# Altium PCB A7000RiscPC_Joystick.PcbDoc
Units mm, origin at the board's own origin, x right, y up, seen from the top; angles counter-clockwise.
Board outline 75 x 84 mm, 2 copper layers (Top Layer, Bottom Layer), stack 1.671 mm thick; 45 components, 73 nets, 211 pads, 66 vias.
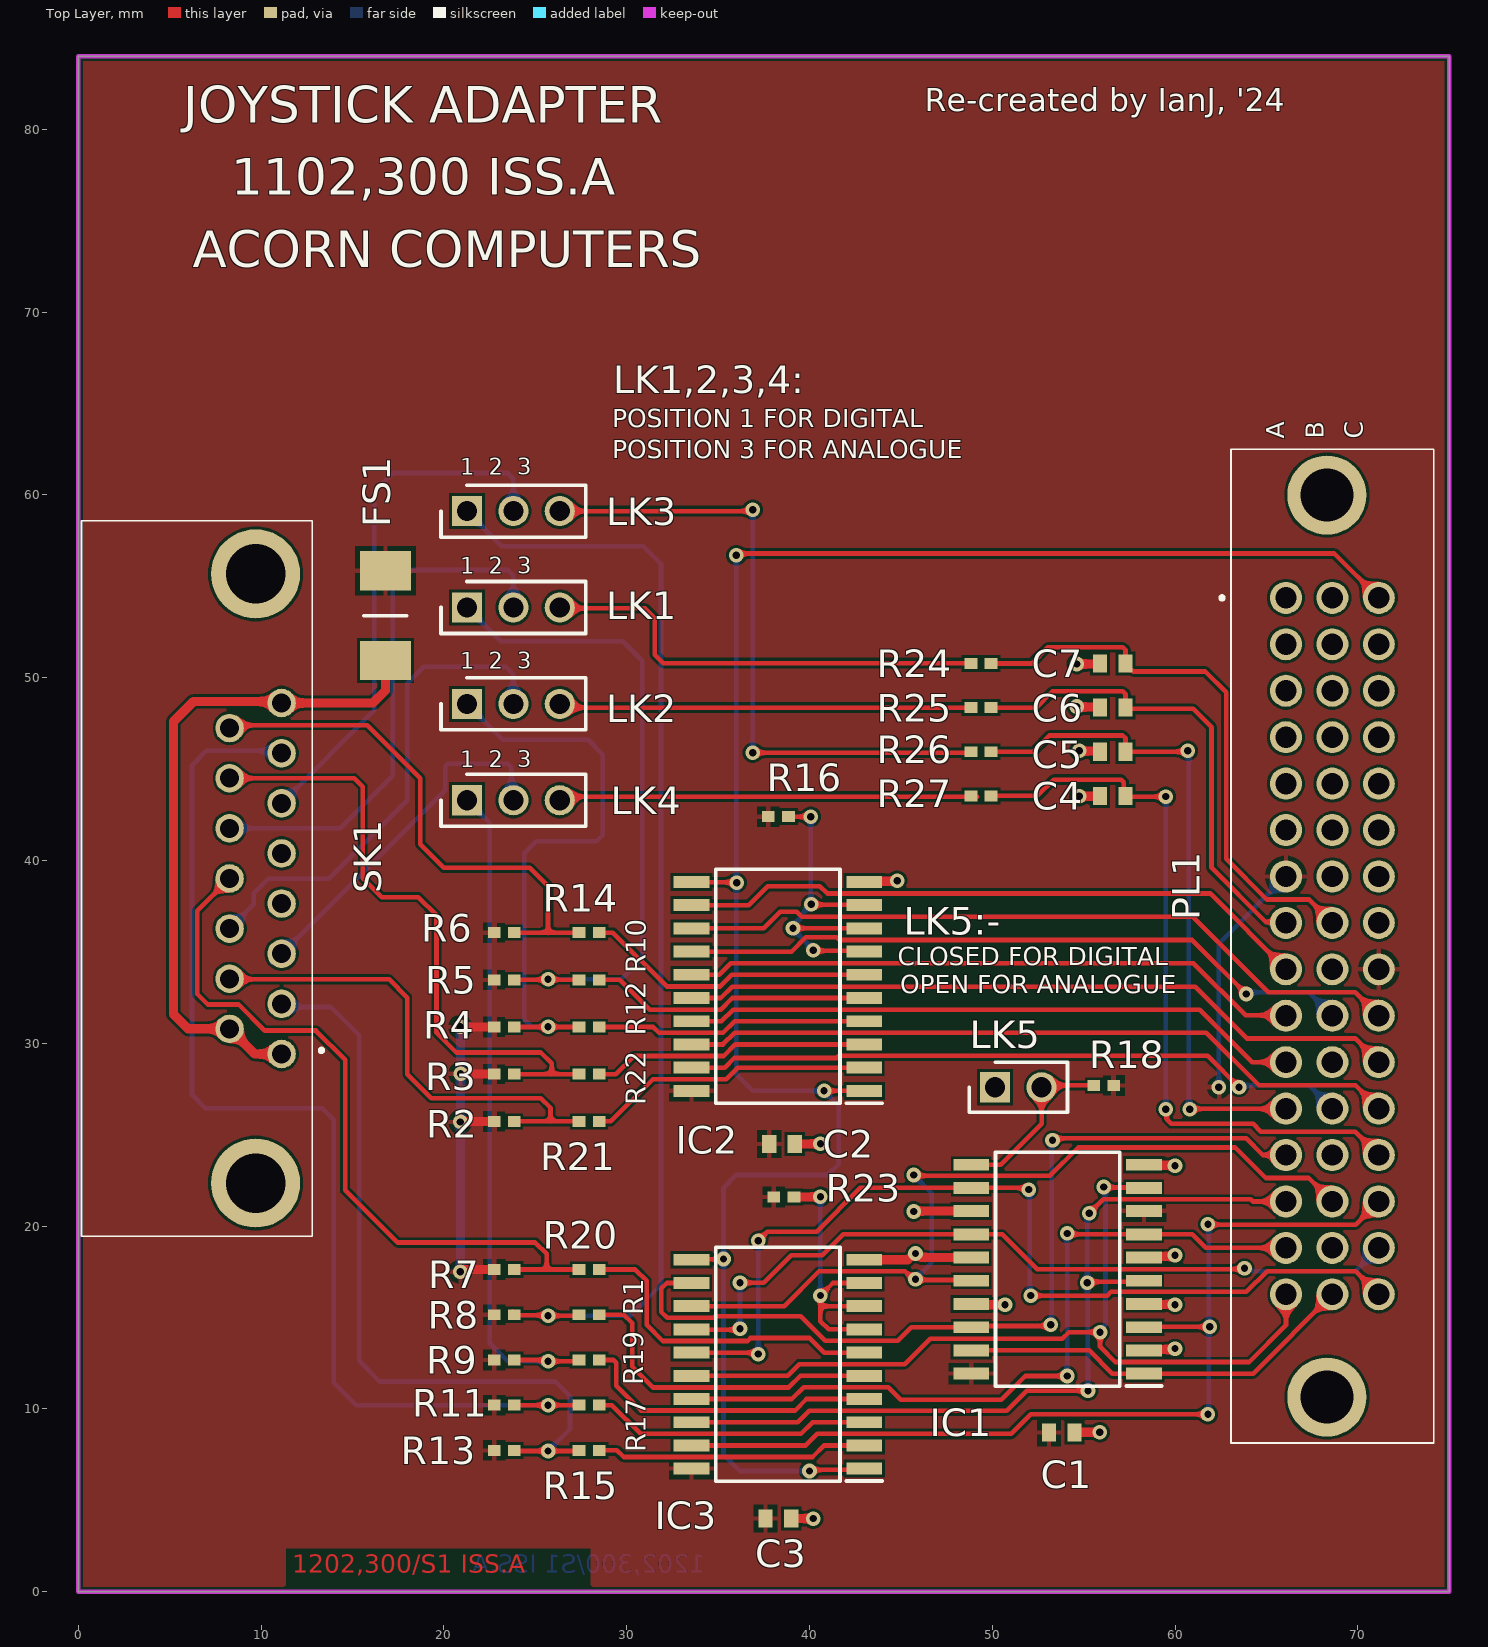
[diagram p0: Top Layer view]
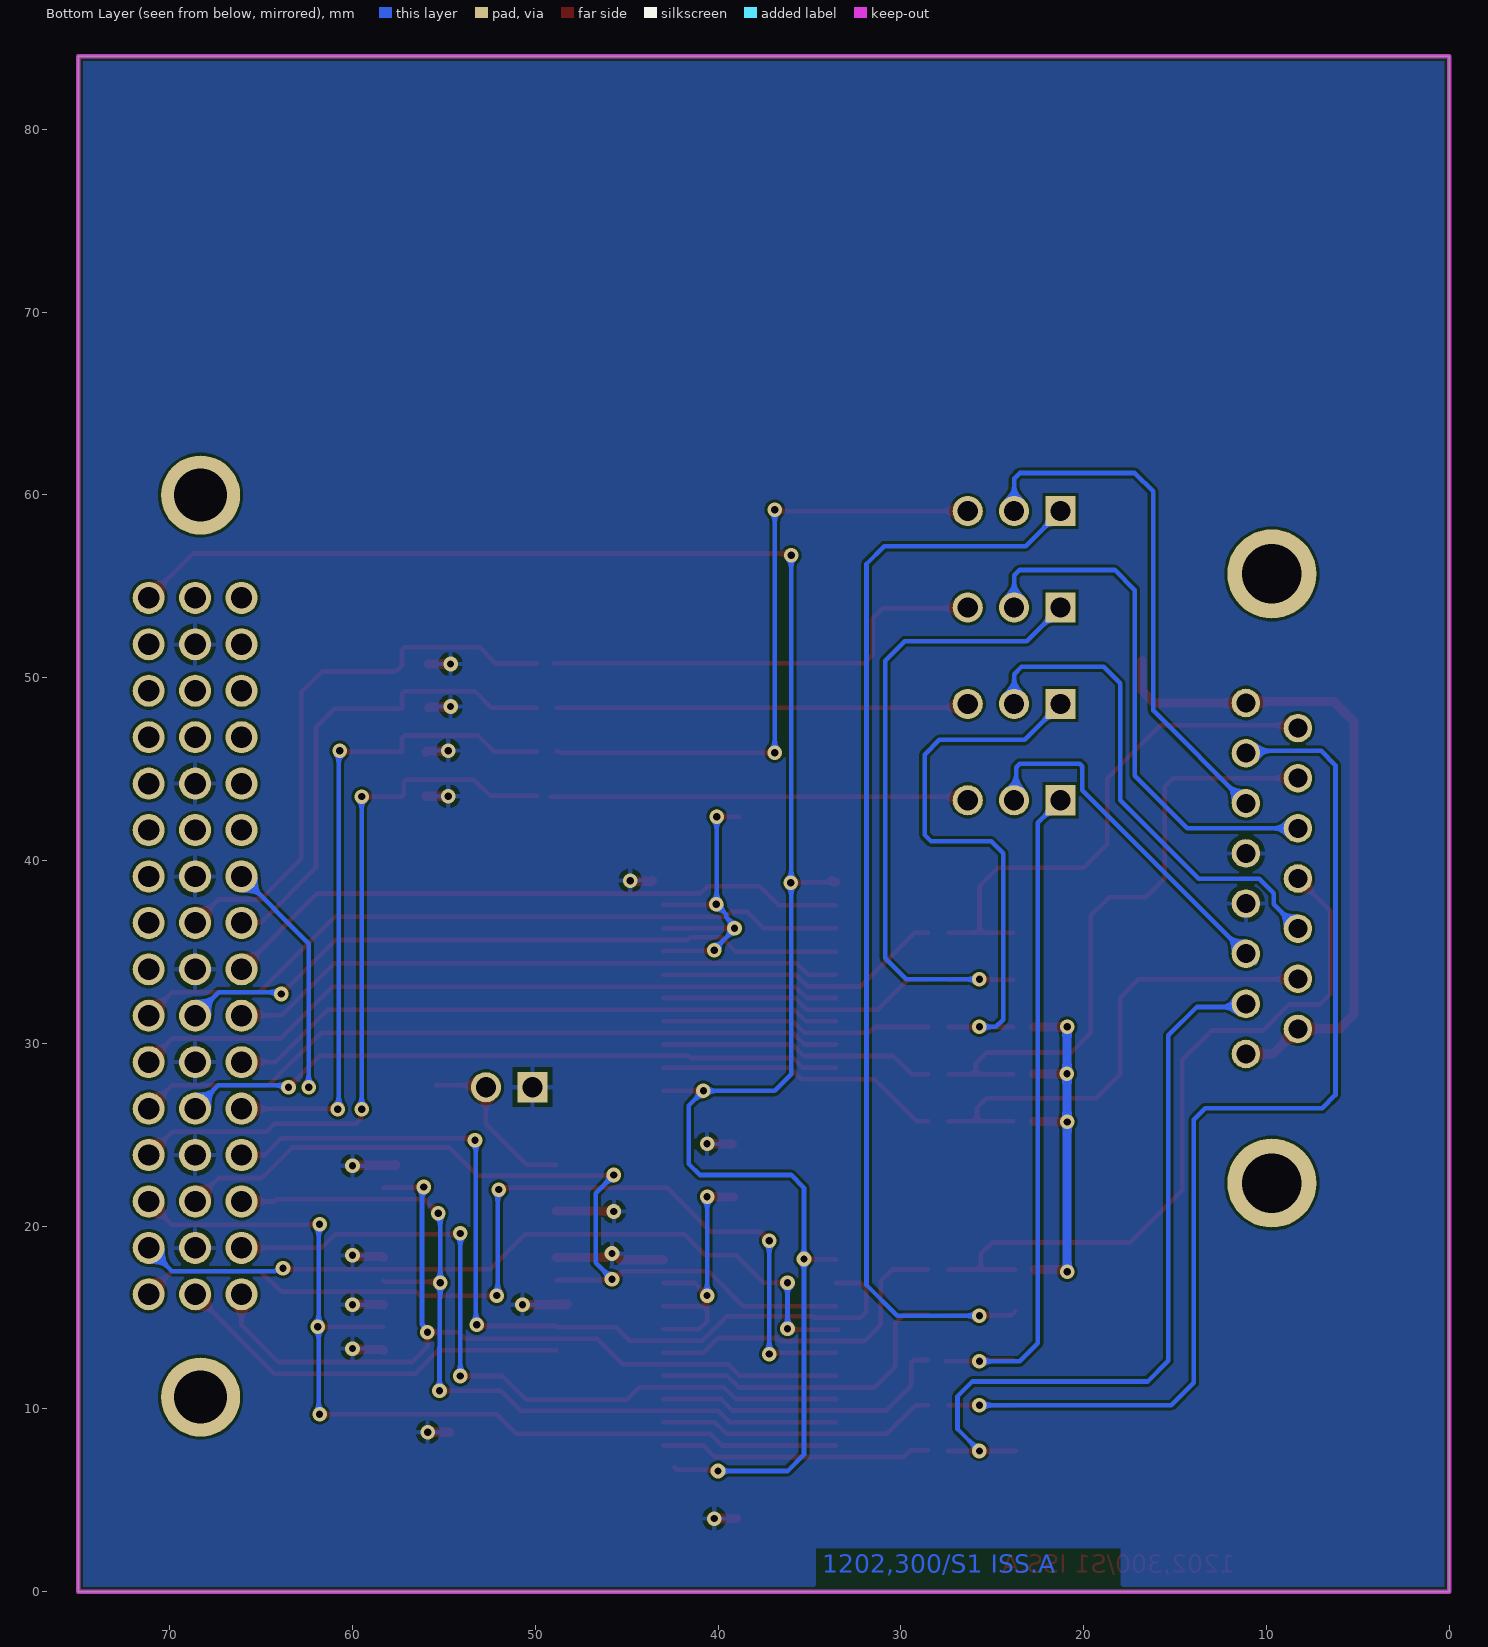
[diagram p1: Bottom Layer view, seen from below]
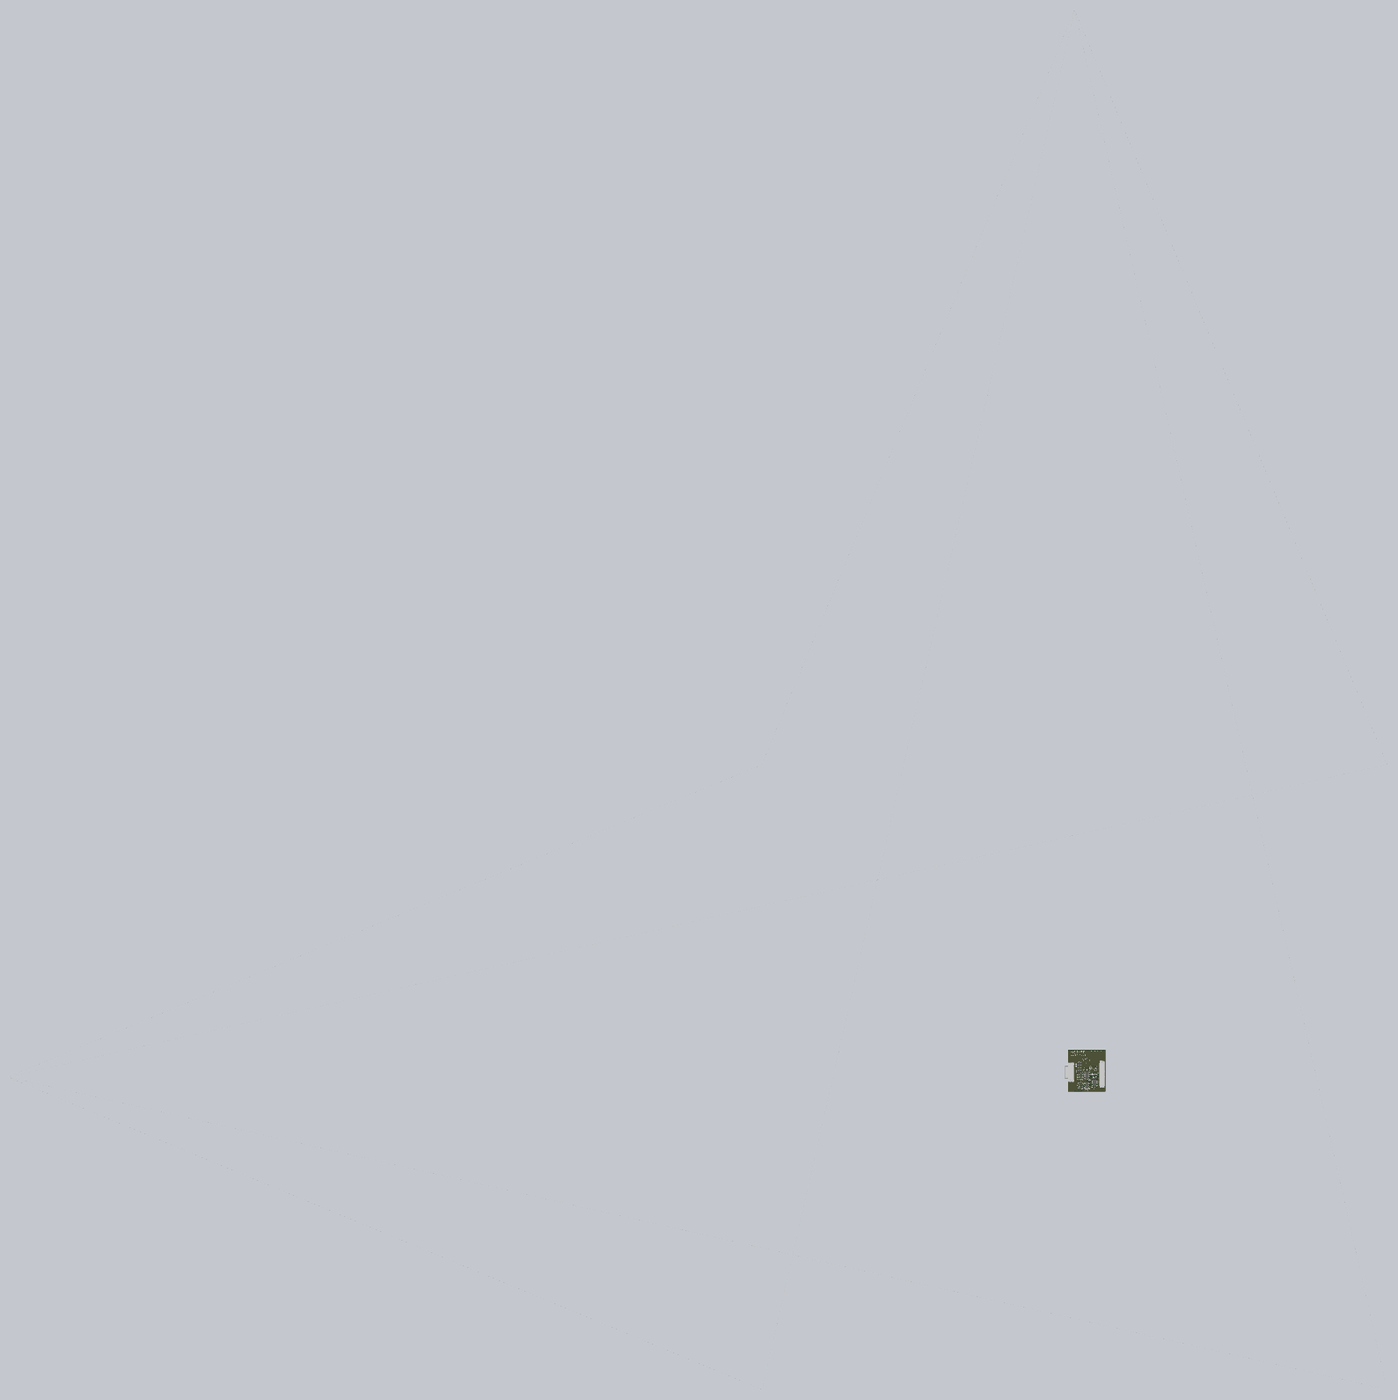
[diagram p2: 3D render of the assembled board from above, using the file's embedded part models]

## Layer stack, top to bottom
Top Solder: solder mask 0.0102, Solder Resist, Dk 3.5
Top Layer: signal copper 0.0356
Dielectric 1: dielectric 0.2, FR-4, Dk 4.8
Dielectric 2: core 1.2, PP-006, Dk 4.1
Dielectric2: dielectric 0.2, FR-4, Dk 4.8
Bottom Layer: signal copper 0.0356
Bottom Solder: solder mask 0.0102, Solder Resist, Dk 3.5

## Board outline
0,0 0,84 75,84 75,0

## Design rules (kind name [scope] priority, off if disabled: settings)
Clearance [All] p1: gap=0.15 ignorepadtopadclearanceinfootprint=FALSE
HoleSize [All] p1: absolutevalues=TRUE maxlimit=5 minlimit=0.025 maxpercent=80.000 minpercent=20.000
MinimumSolderMaskSliver [All] p1: minsoldermaskwidth=0.1
PolygonConnect [All] p1: connectstyle=Relief reliefconductorwidth=0.254 reliefentries=4 polygonreliefangle="90 Angle" airgapwidth=0.254
RoutingVias [All] p1: holewidth=0.711 width=1.27 viastyle="Through Hole" minholewidth=0.711 minwidth=1.27 maxholewidth=0.711 maxwidth=1.27
SilkToSilkClearance [All] p1 off: silktosilkclearance=0.254
SilkToSolderMaskClearance [IsPad] p1 off: minsilkscreentomaskgap=0.254 clearancetoexposedcopper=TRUE
SolderMaskExpansion [All] p1: expansion=0.102 istentingtop=FALSE
SupplyNets "Schematic Supply Nets_1" [InNet('VCC')] p1: voltage=0.000
SupplyNets "Schematic Supply Nets" [InNet('GND')] p2: voltage=0.000
Width [All] p1: maxlimit=0.5 minlimit=0.254 preferedwidth=0.254 minimp=50.000000 maximp=50.000000 favimp=50.000000
26 further rules are at their usual default settings.

## Components (designator, comment, footprint, x,y, rotation, side; value= is the part's Value field where it differs from the comment)
C1 "100nF" CAPC1608X90N 53.8,8.7 r0 top locked
C2 "100nF" CAPC1608X90N 38.5,24.5 r0 top locked
C3 "100nF" CAPC1608X90N 38.3,4 r0 top locked
C4 "06033C104KAT4A" CAPC1608X90N 56.594,43.539 r0 top locked
C5 "22nF" CAPC1608X90N 56.594,45.952 r0 top locked
C6 "22nF" CAPC1608X90N 56.594,48.365 r0 top locked
C7 "22nF" CAPC1608X90N 56.594,50.778 r0 top locked
FS1 "0679L0250-05" FUSC6125X279N 16.8,53.4 r90 top locked
IC1 "74HCT244" SOIC127P1030X265-20N 53.575,17.645 r180 top locked
IC2 "74HCT574" SOIC127P1030X265-20N 38.275,33.115 r180 top locked
IC3 "74HCT574" SOIC127P1030X265-20N 38.275,12.445 r180 top locked
LK1 "PREC003SAAN-RC" HDRV3W64P0X254_1X3_762X254X868P 21.26,53.845 r0 top locked
LK2 "PREC003SAAN-RC" HDRV3W64P0X254_1X3_762X254X868P 21.26,48.572 r0 top locked
LK3 "PREC003SAAN-RC" HDRV3W64P0X254_1X3_762X254X868P 21.26,59.117 r0 top locked
LK4 "PREC003SAAN-RC" HDRV3W64P0X254_1X3_762X254X868P 21.26,43.3 r0 top locked
LK5 "PREC002SAAN-RC" HDRV2W64P0X254_1X2_508X254X854P 50.16,27.6 r0 top
PL1 "5650479-5" 56504795 66.07,54.37 r90 top locked
R1 "1K" RESC1005X35N 27.946,15.151 r0 top locked
R2 "4K7" RESC1005X35N 23.305,25.729 r180 top locked
R3 "4K7" RESC1005X35N 23.305,28.31 r0 top locked
R4 "4K7" RESC1005X35N 23.305,30.891 r0 top locked
R5 "4K7" RESC1005X35N 23.305,33.473 r0 top locked
R6 "4K7" RESC1005X35N 23.305,36.054 r0 top locked
R7 "4K7" RESC1005X35N 23.305,17.623 r0 top locked
R8 "4K7" RESC1005X35N 23.305,15.151 r0 top locked
R9 "4K7" RESC1005X35N 23.305,12.678 r0 top locked
R10 "1K" RESC1005X35N 27.946,33.473 r0 top locked
R11 "4K7" RESC1005X35N 23.305,10.206 r0 top locked
R12 "1K" RESC1005X35N 27.946,30.891 r0 top locked
R13 "4K7" RESC1005X35N 23.305,7.733 r0 top locked
R14 "1K" RESC1005X35N 27.946,36.054 r0 top locked
R15 "1K" RESC1005X35N 27.946,7.733 r0 top locked
R16 "1K" RESC1005X35N 38.3,42.4 r180 top locked
R17 "1K" RESC1005X35N 27.946,10.206 r0 top locked
R18 "4K7" RESC1005X35N 56.1,27.7 r180 top
R19 "1K" RESC1005X35N 27.946,12.678 r0 top locked
R20 "1K" RESC1005X35N 27.946,17.623 r0 top locked
R21 "1K" RESC1005X35N 27.946,25.729 r0 top locked
R22 "1K" RESC1005X35N 27.946,28.31 r0 top locked
R23 "1K" RESC1005X35N 38.6,21.6 r180 top locked
R24 "2K2" RESC1005X35N 49.385,50.778 r0 top locked
R25 "2K2" RESC1005X35N 49.385,48.365 r0 top locked
R26 "2K2" RESC1005X35N 49.385,45.952 r0 top locked
R27 "2K2" RESC1005X35N 49.385,43.539 r180 top locked
SK1 "5747845-4" 57478454 11.12,29.417 r270 top locked

## Footprints (in the part's own frame and the unit in brackets; to place one, negate y for a bottom-side part, rotate by r counter-clockwise, add the part's x,y. Pads: shape width x height; smd on the part's side, far side on the other; paste and mask are expansions set on the pad)
56504795 [mm]
  round 1.755 hole 1.17: A1(0,0) A2(-2.54,0) A3(-5.08,0) A4(-7.62,0) A5(-10.16,0) A6(-12.7,0) A7(-15.24,0) A8(-17.78,0) A9(-20.32,0) A10(-22.86,0) A11(-25.4,0) A12(-27.94,0) A13(-30.48,0) A14(-33.02,0) A15(-35.56,0) A16(-38.1,0) B1(0,-2.54) B2(-2.54,-2.54) B3(-5.08,-2.54) B4(-7.62,-2.54) B5(-10.16,-2.54) B6(-12.7,-2.54) B7(-15.24,-2.54) B8(-17.78,-2.54) B9(-20.32,-2.54) B10(-22.86,-2.54) B11(-25.4,-2.54) B12(-27.94,-2.54) B13(-30.48,-2.54) B14(-33.02,-2.54) B15(-35.56,-2.54) B16(-38.1,-2.54) C1(0,-5.08) C2(-2.54,-5.08) C3(-5.08,-5.08) C4(-7.62,-5.08) C5(-10.16,-5.08) C6(-12.7,-5.08) C7(-15.24,-5.08) C8(-17.78,-5.08) C9(-20.32,-5.08) C10(-22.86,-5.08) C11(-25.4,-5.08) C12(-27.94,-5.08) C13(-30.48,-5.08) C14(-33.02,-5.08) C15(-35.56,-5.08) C16(-38.1,-5.08)
  round 4.335 hole 2.89: MH1(-43.725,-2.24) MH2(5.625,-2.24)
  silkscreen extent -46.23,-8.09 8.13,3.6, body extent -46.17,-8.05 8.07,2.97, height 11.57
57478454 [mil]
  round 61.5 hole 41: 1(0,0) 2(-107.99,0) 3(-215.98,0) 4(-324.02,0) 5(-432.01,0) 6(-540,0) 7(-647.99,0) 8(-755.98,0) 9(-54.02,-112.01) 10(-162.01,-112.01) 11(-270,-112.01) 12(-377.99,-112.01) 13(-485.98,-112.01) 14(-594.02,-112.01) 15(-702.01,-112.01)
  round 192.01 hole 128: MH1(-1034.02,-55.98) MH2(277.99,-55.98)
  silkscreen extent -1149,-431 393,90, body extent -1153,-673 397,71, height 489
CAPC1608X90N [mm]
  rect 0.78x0.99 smd: 1(-0.7,0) 2(0.7,0)
  body extent -0.8,-0.41 0.8,0.41, height 0.9
FUSC6125X279N [mm]
  rect 2.15x2.8 smd: 1(-2.455,0) 2(2.455,0)
  silkscreen extent 0,-1.17 0,1.17, body extent -3.05,-1.27 3.05,1.27, height 2.79
HDRV2W64P0X254_1X2_508X254X854P [mm]
  rect 1.65x1.65 hole 1.1: 1(0,0)
  round 1.65 hole 1.1: 2(2.54,0)
  silkscreen extent -1.42,-1.37 3.96,1.37, body extent -1.27,-1.27 3.81,1.27, height 8.54
HDRV3W64P0X254_1X3_762X254X868P [mm]
  rect 1.65x1.65 hole 1.1: 1(0,0)
  round 1.65 hole 1.1: 2(2.54,0) 3(5.08,0)
  silkscreen extent -1.42,-1.42 6.5,1.42, body extent -1.27,-1.27 6.35,1.27, height 8.68
RESC1005X35N [mm]
  rect 0.7x0.6 smd: 1(-0.55,0) 2(0.55,0)
  body extent -0.5,-0.25 0.5,0.25, height 0.35
SOIC127P1030X265-20N [mm]
  rect 1.95x0.65 smd: 1(-4.725,5.715) 2(-4.725,4.445) 3(-4.725,3.175) 4(-4.725,1.905) 5(-4.725,0.635) 6(-4.725,-0.635) 7(-4.725,-1.905) 8(-4.725,-3.175) 9(-4.725,-4.445) 10(-4.725,-5.715) 11(4.725,-5.715) 12(4.725,-4.445) 13(4.725,-3.175) 14(4.725,-1.905) 15(4.725,-0.635) 16(4.725,0.635) 17(4.725,1.905) 18(4.725,3.175) 19(4.725,4.445) 20(4.725,5.715)
  silkscreen extent -5.7,-6.4 3.4,6.4, body extent -5.16,-6.4 5.16,6.4, height 1.75

## Part data
C1 C2 C3: library part 06033C104KAT4A, "Capacitor", Manufacturer_Name=AVX, Mouser Part Number=581-06033C104KAT4A, Arrow Part Number=06033C104KAT4A, Arrow Price/Stock=https://www.arrow.com/en/products/06033c104kat4a/avx?region=nac, Datasheet Link=http://www.mouser.com/catalog/supplier/library/pdf/AVXSurfaceMountCeramic.pdf, Height=0.9mm, Manufacturer_Part_Number=06033C104KAT4A, Mouser Price/Stock=https://www.mouser.co.uk/ProductDetail/AVX/06033C104KAT4A?qs=8C2chATdSPiv3E9zfPZulg%3D%3D
C4: "Capacitor", Manufacturer_Name=AVX, Mouser Part Number=581-06033C104KAT4A, Arrow Part Number=06033C104KAT4A, Arrow Price/Stock=https://www.arrow.com/en/products/06033c104kat4a/avx?region=nac, Datasheet Link=http://www.mouser.com/catalog/supplier/library/pdf/AVXSurfaceMountCeramic.pdf, Height=0.9mm, Manufacturer_Part_Number=06033C104KAT4A, Mouser Price/Stock=https://www.mouser.co.uk/ProductDetail/AVX/06033C104KAT4A?qs=8C2chATdSPiv3E9zfPZulg%3D%3D
C5 C6 C7: library part 06035C223JAT2A, "Capacitor", Manufacturer_Name="Kyocera AVX", Mouser Part Number=581-06035C223JAT2A, Arrow Part Number=06035C223JAT2A, Arrow Price/Stock=https://www.arrow.com/en/products/06035c223jat2a/avx?region=nac, Datasheet Link=https://componentsearchengine.com/Datasheets/1/06031A100FAT2A.pdf, Height=0.9mm, Manufacturer_Part_Number=06035C223JAT2A, Mouser Price/Stock=https://www.mouser.co.uk/ProductDetail/AVX/06035C223JAT2A?qs=afD3lGjG3YqhAkr5SYOZ9w%3D%3D
FS1: "Fuse", Manufacturer_Name=BelFuse, Mouser Part Number=530-0679L0250-05, Arrow Part Number=0679L0250-05, Arrow Price/Stock=https://www.arrow.com/en/products/0679l0250-05/bel-group, Datasheet Link=https://componentsearchengine.com/Datasheets/1/0679L0250-05.pdf, Height=2.79mm, Manufacturer_Part_Number=0679L0250-05, Mouser Price/Stock=https://www.mouser.co.uk/ProductDetail/Bel-Fuse/0679L0250-05?qs=ZqXcJfGlKshcahFINUdbuA%3D%3D
IC1: library part CD74HCT244M, "Integrated Circuit", Manufacturer_Name="Texas Instruments", Mouser Part Number=595-CD74HCT244M, Arrow Part Number=CD74HCT244M, Arrow Price/Stock=https://www.arrow.com/en/products/cd74hct244m/texas-instruments, Datasheet Link=http://www.ti.com/lit/ds/symlink/cd74hct244.pdf, Height=2.65mm, Manufacturer_Part_Number=CD74HCT244M, Mouser Price/Stock=https://www.mouser.co.uk/ProductDetail/Texas-Instruments/CD74HCT244M?qs=Zu35EjizYSTgCG79gnRrHA%3D%3D
IC2 IC3: library part CD74HCT574M, "Integrated Circuit", Manufacturer_Name="Texas Instruments", Mouser Part Number=595-CD74HCT574M, Datasheet Link=http://www.ti.com/lit/ds/symlink/cd74hct574.pdf, Height=2.65mm, Manufacturer_Part_Number=CD74HCT574M, Mouser Price/Stock=https://www.mouser.co.uk/ProductDetail/Texas-Instruments/CD74HCT574M?qs=vul0MlC%2Fa1fKWyIOireUAw%3D%3D
LK1 LK2 LK3 LK4 LK5: "Connector", Manufacturer_Name=Sullins
  LK1 LK2 LK3 LK4: Datasheet Link=https://media.digikey.com/PDF/Data%20Sheets/Sullins%20PDFs/z%20RzCzzzSzzN-RC,%20ST,11635-B.pdf, Height=8.68mm, Manufacturer_Part_Number=PREC003SAAN-RC
  LK5: Datasheet Link=https://drawings-pdf.s3.amazonaws.com/11635.pdf, Height=8.54mm, Manufacturer_Part_Number=PREC002SAAN-RC
PL1: "Connector", Manufacturer_Name="TE Connectivity", Mouser Part Number=571-5650479-5, Arrow Part Number=5650479-5, Arrow Price/Stock=https://www.arrow.com/en/products/5650479-5/te-connectivity?region=europe, Datasheet Link=https://www.te.com/commerce/DocumentDelivery/DDEController?Action=showdoc&DocId=Customer+Drawing%7F5650479%7FP%7Fpdf%7FEnglish%7FENG_CD_5650479_P.pdf%7F5650479-5, Height=11.61mm, Manufacturer_Part_Number=5650479-5, Mouser Price/Stock=https://www.mouser.co.uk/ProductDetail/TE-Connectivity/5650479-5?qs=xrnNvQC1SKQu%252BZBLSdOcFw%3D%3D
R1 R10 R12 R14 R15 R17 R19 R20 R21 R22 R23: library part CPF0402B102KE1, "Resistor", Manufacturer_Name="TE Connectivity", Mouser Part Number=279-CPF0402B102KE1, Datasheet Link=http://www.farnell.com/datasheets/1786775.pdf, Height=0.35mm, Manufacturer_Part_Number=CPF0402B102KE1, Mouser Price/Stock=https://www.mouser.com/Search/Refine.aspx?Keyword=279-CPF0402B102KE1
R2 R3 R4 R5 R6 R7 R8 R9 R11 R13 R18: library part CPF0402B4K7E, "Resistor", Manufacturer_Name="TE Connectivity", Mouser Part Number=279-CPF0402B4K7E, Arrow Part Number=CPF0402B4K7E, Arrow Price/Stock=https://www.arrow.com/en/products/cpf0402b4k7e/te-connectivity?region=nac, Datasheet Link=http://www.farnell.com/datasheets/1786775.pdf, Height=0.35mm, Manufacturer_Part_Number=CPF0402B4K7E, Mouser Price/Stock=https://www.mouser.co.uk/ProductDetail/TE-Connectivity-Holsworthy/CPF0402B4K7E?qs=gt1LBUVyoHnSdGQa1TSPWQ%3D%3D
R16 R24 R25 R26 R27: library part CPF0402B2K2E, "Resistor", Manufacturer_Name="TE Connectivity", Mouser Part Number=N/A, Datasheet Link=http://www.farnell.com/datasheets/1786775.pdf, Height=0.35mm, Manufacturer_Part_Number=CPF0402B2K2E, Mouser Price/Stock=https://www.mouser.com/Search/Refine.aspx?Keyword=N%2FA
SK1: "Connector", Manufacturer_Name="TE Connectivity", Mouser Part Number=571-5747845-4, Arrow Part Number=5747845-4, Arrow Price/Stock=https://www.arrow.com/en/products/5747845-4/te-connectivity?region=europe, Datasheet Link=http://www.te.com/commerce/DocumentDelivery/DDEController?Action=showdoc&DocId=Customer+Drawing%7F5747845%7FA2%7Fpdf%7FEnglish%7FENG_CD_5747845_A2.pdf%7F5747845-4, Height=12.5476mm, Manufacturer_Part_Number=5747845-4, Mouser Price/Stock=https://www.mouser.co.uk/ProductDetail/TE-Connectivity/5747845-4?qs=x6EjVpvqMVM20FyCQQpjQA%3D%3D

## Via types
v1: diameter 0.8, hole 0.4, Top Layer to Bottom Layer, tented both sides, 66 vias

## Nets (pads, with @x,y where several pads share a name; then routed paths per layer and width w, separated by ;. In a path a pad name is that pad's centre, name@x,y a point inside that pad or via, vN(x,y) a via of type N, cw(c..) or ccw(c..) an arc to the next point about the centre after c; other vN are vias at no path point)
BD0: IC1.3 IC3.19 PL1.C14 | length 52.9
  Top Layer w0.254: IC3.19 39.8,8 40.435,8.635 51.035,8.635 52.1,9.7 v1(61.8,9.7) ; IC1.3 58.315,14.485 61.885,14.485 v1(61.9,14.5) ; v1(61.8,20.1) 61.817,20.083 69.883,20.083 PL1.C14
  Bottom Layer w0.254: v1(61.8,9.7) 61.85,9.75 61.85,14.45 61.902,14.502 61.85,14.554 61.85,20.05 v1(61.8,20.1)
BD1: IC1.5 IC3.18 PL1.A14 | length 46.4
  Top Layer w0.254: IC3.18 39.37,9.27 40,9.9 50.8,9.9 51.9,11 v1@55.2,11 ; v1(55.2,16.9) 55.255,16.955 58.245,16.955 IC1.5 ; v1(55.3,20.7) 56.066,21.466 64.134,21.466 64.25,21.35 PL1.A14
  Bottom Layer w0.254: v1(55.237,10.987) 55.237,13.366 55.223,13.38 55.223,16.03 55.2,16.053 55.2,20.6 v1(55.3,20.7)
BD2: IC1.7 IC3.17 PL1.A15 | length 41.7
  Top Layer w0.254: IC3.17 39.04,10.54 39.683,11.183 44.317,11.183 45,10.5 50.5,10.5 51.8,11.8 v1(54.1,11.8) ; v1(54.1,19.6) 54.15,19.55 IC1.7 60.95,19.55 61.69,18.81 PL1.A15
  Bottom Layer w0.254: v1(54.1,11.8) v1(54.1,19.6)
BD3: IC1.9 IC3.16 PL1.A16 | length 47.5
  Top Layer w0.254: IC3.16 38.81,11.81 39.447,12.447 45.219,12.447 46.607,13.836 53.836,13.836 54.2,14.2 v1(55.9,14.2) 55.9,13.4 56.732,12.568 64.068,12.568 66.07,14.57 PL1.A16 ; v1(56.096,22.143) 56.123,22.117 58.273,22.117 IC1.9
  Bottom Layer w0.254: v1(55.9,14.2) 55.9,14.322 56.2,14.622 56.2,22.039 v1(56.096,22.143)
BD4: IC1.12 IC3.15 PL1.C16 | length 51.9
  Top Layer w0.254: IC3.15 37.12,13.08 v1(37.2,13) ; v1(37.2,19.2) 37.7,19.7 40.4,19.7 42.79,22.09 IC1.12 51.91,22.09 v1(52,22) ; v1(52.1,16.2) 56.3,16.2 56.5,16.4 63.9,16.4 65.037,17.537 69.883,17.537 PL1.C16
  Bottom Layer w0.254: v1(37.2,13) v1(37.2,19.2) ; v1(52,22) 52.05,21.95 52.05,16.25 v1(52.1,16.2)
BD5: IC1.14 IC3.14 PL1.C15 | length 42.8
  Top Layer w0.254: IC3.14@33.42,14.325 36.132,14.325 v1(36.2,14.393) ; v1(36.198,16.902) 37.502,16.902 39,18.4 40.7,18.4 41.85,19.55 IC1.14 50.55,19.55 52.453,17.647 63.747,17.647 v1(63.8,17.7)
  Bottom Layer w0.254: v1(36.198,16.902) 36.199,16.901 v1(36.2,14.393) v1(36.2,14.393) ; v1(63.8,17.7) 63.904,17.596 64.16,17.596 64.222,17.534 69.874,17.534 PL1.C15
BD6: IC1.16 IC3.13 PL1.B14 | length 47.6
  Top Layer w0.254: IC3.13 38.62,15.62 40.523,17.523 45.229,17.523 45.652,17.1 v1(45.8,17.1) 45.845,17.055 48.805,17.055 IC1.16 ; v1(45.7,22.8) 45.742,22.758 53.158,22.758 54.7,24.3 63.3,24.3 64.966,22.634 67.326,22.634 PL1.B14
  Bottom Layer w0.254: v1(45.7,22.8) 46.7,21.8 46.7,18 v1(45.8,17.1)
BD7: IC1.18 IC3.12 PL1.A13 | length 48.8
  Top Layer w0.254: IC3.12 32.19,16.89 31.9,16.6 31.9,15.3 32.214,14.986 34.748,14.986 34.832,15.07 39.53,15.07 40.876,13.724 44.824,13.724 45.57,14.47 IC1.18 48.915,14.535 53.135,14.535 v1(53.2,14.6) ; v1(53.3,24.7) 53.4,24.8 63.9,24.8 64.81,23.89 PL1.A13
  Bottom Layer w0.254: v1(53.2,14.6) 53.25,14.65 53.25,24.65 v1(53.3,24.7)
BD8: IC2.19 PL1.B12 | length 36.6
  Top Layer w0.254: IC2.19 35.37,28.67 35.9,29.2 41.5,29.2 41.615,29.315 61.785,29.315 v1(63.5,27.6)
  Bottom Layer w0.254: v1(63.5,27.6) 63.601,27.701 67.339,27.701 PL1.B12
BD9: IC2.18 PL1.C12 | length 39.6
  Top Layer w0.254: IC2.18 35.269,29.94 35.914,30.585 61.715,30.585 64.594,27.706 69.874,27.706 PL1.C12
BD10: IC2.17 PL1.A11 | length 34
  Top Layer w0.254: IC2.17 35.187,31.21 35.823,31.847 59.353,31.847 61.353,31.847 64.23,28.97 PL1.A11
BD11: IC2.16 PL1.C11 | length 39.6
  Top Layer w0.254: IC2.16 35.156,32.48 35.776,33.1 61.1,33.1 63.933,30.267 69.853,30.267 PL1.C11
BD12: IC2.15 PL1.A10 | length 34
  Top Layer w0.254: IC2.15 35.063,33.75 35.704,34.391 59.691,34.391 61.009,34.391 63.86,31.54 66.04,31.54 PL1.A10
BD13: IC2.14 PL1.B10 | length 37.2
  Top Layer w0.254: IC2.14 39.02,35.02 39.8,35.8 41.5,35.8 41.649,35.651 60.949,35.651 v1(63.9,32.7)
  Bottom Layer w0.254: v1(63.9,32.7) 63.994,32.794 67.326,32.794 PL1.B10
BD14: IC2.13 PL1.C10 | length 40.3
  Top Layer w0.254: IC2.13 37.49,36.29 38.4,37.2 39.3,37.2 39.572,36.928 60.972,36.928 65.099,32.801 69.859,32.801 PL1.C10
BD15: IC2.12 PL1.A9 | length 34.8
  Top Layer w0.254: IC2.12 36.679,37.56 37.719,38.6 40.57,38.6 40.97,38.2 61.92,38.2 PL1.A9
dJoyAFire: R7.2 R20.1 SK1.12 | length 40.7
  Top Layer w0.254: SK1.12 6.5,37.243 6.5,32.7 7.076,32.124 8.776,32.124 10.2,30.7 13,30.7 14.605,29.095 14.605,21.971 17.476,19.1 25,19.1 25.623,18.477 25.623,17.623 ; R7.2@23.755,17.623 25.623,17.623 ; R20.1 25.623,17.623
dJoyALeft: LK4.1 R9.2 R19.1 | length 37.6
  Top Layer w0.254: R9.2 25.622,12.678 v1(25.7,12.6) R19.1@27.535,12.6
  Bottom Layer w0.254: LK4.1 22.5,42.06 22.5,13.6 23.5,12.6 v1@25.596,12.6 ; v1@25.596,12.704 v1(25.7,12.6)
dJoyARight: LK3.1 R1.1 R8.2 | length 62
  Top Layer w0.254: R8.2@23.755,15.337 23.755,15.323 23.978,15.1 24.055,15.1 24.055,15.103 24.078,15.125 25.675,15.125 v1(25.7,15.1) R1.1@27.486,15.1
  Bottom Layer w0.254: LK3.1 23.177,57.2 30.9,57.2 31.877,56.223 31.877,16.777 30.2,15.1 v1(25.7,15.1)
dJoyBFire: R6.2 R14.1 SK1.15 | length 29.5
  Top Layer w0.254: SK1.15@8.082,47.4 15.8,47.4 18.7,44.5 18.7,40.9 20,39.6 24.7,39.6 25.7,38.6 25.7,36.054 ; R6.2 25.7,36.054 ; R14.1 25.7,36.054
dJoyBLeft: LK2.1 R4.2 R12.1 | length 31.8
  Top Layer w0.254: R4.2 23.859,30.896 25.696,30.896 v1(25.7,30.9) 25.704,30.896 27.392,30.896 R12.1
  Bottom Layer w0.254: LK2.1 23.232,46.6 27.9,46.6 28.7,45.8 28.7,41.4 28.35,41.05 25.05,41.05 24.4,40.4 24.4,37.1 24.4,31.3 24.8,30.9 v1(25.7,30.9)
dJoyBRight: LK1.1 R5.2 R10.1 | length 36.3
  Top Layer w0.254: R5.2 23.869,33.486 25.686,33.486 v1(25.7,33.5) 25.714,33.486 27.382,33.486 R10.1
  Bottom Layer w0.254: LK1.1 23.105,52 29.788,52 30.861,50.927 30.861,34.661 29.7,33.5 v1(25.7,33.5)
GND: C1.2 C2.2 C3.2 C4.1 C5.1 C6.1 C7.1 IC1.2 IC1.4 IC1.6 IC1.10 IC1.13 IC1.15 IC1.17 IC2.10 IC3.10 LK5.1 PL1.B2 PL1.B5 PL1.B7 PL1.B9 PL1.B11 PL1.B13 PL1.B15 SK1.4 SK1.5 | length 29.9
  Top Layer w0.5: C3.2 v1(40.205,4) ; C2.2 v1(40.6,24.5) ; IC3.10 45.379,18.16 45.719,18.5 45.881,18.5 46.101,18.28 IC1.15 ; IC2.10@43.587,38.9 43.622,38.865 44.765,38.865 v1(44.8,38.9) ; v1(45.7,20.8) 45.72,20.82 IC1.13 ; IC1.17 48.242,15.74 48.282,15.7 v1(50.7,15.7) ; v1(54.633,48.429) 54.665,48.397 55.783,48.397 C6.1@55.838,48.342 ; v1(54.633,50.755) C7.1@55.838,50.755 ; C1.2@54.683,8.723 v1(55.888,8.723) ; v1(54.76,43.516) C4.1@55.965,43.516 ; v1(54.76,46.016) 54.792,45.984 55.91,45.984 C5.1@55.965,45.929 ; IC1.10@57.625,23.36 57.655,23.33 59.97,23.33 v1(60,23.3) ; IC1.2 58.35,13.25 59.95,13.25 v1(60,13.3) ; IC1.4@58.3,15.7 58.32,15.72 59.98,15.72 v1(60,15.7) ; IC1.6 58.363,18.343 59.943,18.343 v1(60,18.4)
  other v1: 45.8,18.5
Interrupt: PL1.C2
JoyA_B1: R13.2 R15.1 SK1.2 | length 42.3
  Top Layer w0.254: R13.2@23.706,7.7 R15.1@27.433,7.7
  Bottom Layer w0.254: SK1.2 11.293,31.987 13.813,31.987 15.367,30.433 15.367,12.633 16.5,11.5 26.1,11.5 26.9,10.7 26.9,8.9 v1(25.7,7.7)
JoyA_B2: R11.2 R17.1 SK1.7 | length 61.8
  Top Layer w0.254: R11.2@23.796,10.2 v1@25.6,10.2 ; v1@25.606,10.206 R17.1
  Bottom Layer w0.254: SK1.7@11.198,46 7,46 6.223,45.223 6.223,27.177 6.951,26.449 13.351,26.449 13.97,25.83 13.97,11.43 15.197,10.203 v1@25.597,10.203
  other v1: 25.7,10.2
JoyAX: LK4.2 SK1.3 | length 20.3
  Bottom Layer w0.254: SK1.3@10.615,34.398 SK1.3 20.066,43.849 20.066,45.151 20.215,45.3 23.5,45.3 23.694,45.106 23.694,43.406 LK4.2
JoyAY: LK3.2 SK1.6 | length 29.6
  Bottom Layer w0.254: SK1.6 16.2,48.213 16.2,60.2 17.2,61.2 23.5,61.2 23.8,60.9 LK3.2@23.8,58.602
JoyB_B3: R2.1 R21.1 SK1.10 | length 27.6
  Top Layer w0.254: SK1.10@7.869,33.5 13.8,33.5 17,33.5 18,32.5 18,28.3 19.3,27 20.3,27 25.3,27 25.834,26.466 25.834,25.729 ; R2.1 25.834,25.729 ; R21.1 25.834,25.729
JoyB_B4: R3.2 R22.1 SK1.14 | length 34.9
  Top Layer w0.254: SK1.14 15.095,44.505 15.564,44.036 15.564,39.036 16.6,38 18.6,38 19.6,37 19.6,30.584 20.684,29.5 25.3,29.5 25.9,28.9 25.9,28.31 ; R3.2 25.9,28.31 ; R22.1 25.9,28.31
JoyBX: LK2.2 SK1.11 | length 27.4
  Bottom Layer w0.254: SK1.11 9.6,37.6 9.6,38.2 10.4,39 13.7,39 18,43.3 18,49.7 18.9,50.6 23.4,50.6 23.8,50.2 LK2.2
JoyBY: LK1.2 SK1.13 | length 29.2
  Bottom Layer w0.254: SK1.13 14.329,41.761 17.2,44.632 17.2,54.8 18.3,55.9 23.5,55.9 23.8,55.6 LK1.2
JoyPwr: FS1.1 SK1.1 SK1.8 SK1.9 | length 36.8
  Top Layer w0.5: SK1.1 9.658,29.417 8.275,30.8 6,30.8 5.207,31.593 5.207,47.607 6.3,48.7 SK1.8@11.12,48.7 ; SK1.8 16.119,48.619 16.8,49.3 FS1.1
LA2: PL1.C6
LA3: PL1.C7
LA4: PL1.A6
LA5: PL1.C5
LA6: PL1.B6
LA7: PL1.A5
LA8: PL1.C4
LA9: PL1.A4
Ncsnet: IC2.1 IC2.11 IC3.1 IC3.11 PL1.C1 | length 109.8
  Top Layer w0.254: IC3.11 33.57,18.18 35.28,18.18 v1(35.3,18.2) ; IC2.11 33.571,38.809 35.997,38.809 v1(36.019,38.787) ; v1(36,56.7) 36.1,56.8 68.72,56.8 PL1.C1 ; v1(40,6.6) 40.065,6.665 42.265,6.665 IC3.1@42.4,6.8 ; v1(40.8,27.4) IC2.1
  Top Layer w0.5: IC2.11 33.725,38.83 IC2.11@33.8,38.905
  Bottom Layer w0.254: v1(36,56.7) 36,28.3 36.9,27.4 v1(40.8,27.4) 41.6,26.6 41.6,23.4 41,22.8 36,22.8 35.3,22.1 35.3,7.5 36.2,6.6 v1(40,6.6)
nEnDigital: IC1.11 LK5.2 R18.2 | length 9.6
  Top Layer w0.254: IC1.11 50.46,23.36 52.7,25.6 LK5.2 52.8,27.7 R18.2@55.45,27.7
NetIC2_7: IC2.7 IC2.8 IC2.9 R16.1 | length 19.4
  Top Layer w0.254: R16.1 v1(40.078,42.4) ; v1(39.1,36.3) 39.105,36.295 42.995,36.295 IC2.8 ; v1(40.1,37.605) 40.123,37.583 42.977,37.583 IC2.9 ; v1(40.2,35.1) 40.24,35.06 42.96,35.06 IC2.7
  Bottom Layer w0.254: v1@40.078,42.693 v1(40.078,42.4) 40.078,37.622 v1@40.096,37.604 ; v1(40.1,37.605) 40.1,37.6 39.55,37.05 39.55,36.898 39.1,36.448 v1(39.1,36.3) 39.1,36.25 40.2,35.15 v1(40.2,35.1)
NetIC3_7: IC3.7 IC3.8 IC3.9 R23.1 | length 15.9
  Top Layer w0.254: IC3.7 41.05,14.35 40.6,14.8 40.6,15.62 ; IC3.8 40.6,15.62 ; IC3.9 41.29,16.89 v1(40.6,16.2) 40.6,15.62
  Top Layer w0.5: R23.1 v1(40.6,21.6)
  Bottom Layer w0.254: v1(40.6,16.2) v1(40.6,21.6)
NetLK1_3: LK1.3 R24.1 | length 24.7
  Top Layer w0.254: LK1.3@26.683,53.8 31,53.8 31.544,53.256 31.544,51.256 32,50.8 R24.1@48.978,50.8
NetLK2_3: LK2.3 R25.1 | length 22.6
  Top Layer w0.254: LK2.3 26.547,48.365 R25.1
NetLK3_3: LK3.3 R26.1 | length 35.7
  Top Layer w0.254: LK3.3 36.817,59.117 v1(36.9,59.2) ; v1(36.9,45.9) R26.1@48.604,45.9 ; R26.1@48.772,46.016 R26.1
  Bottom Layer w0.254: v1(36.9,45.9) v1(36.9,59.2)
NetLK4_3: LK4.3 R27.2 | length 23
  Top Layer w0.254: LK4.3 26.54,43.5 48.796,43.5 R27.2 ; R27.2@48.785,43.5 R27.2@49.171,43.5
Nior: PL1.B1
Niow: PL1.A1
Nromnet: IC1.1 IC1.19 PL1.B16 | length 22.1
  Top Layer w0.254: IC1.19 55.3,13.2 56.57,11.93 IC1.1 64.27,11.93 PL1.B16
Out0: IC3.2 R15.2 | length 14.9
  Top Layer w0.254: R15.2 29.467,7.733 29.831,7.369 40.169,7.369 40.8,8 IC3.2
Out1: IC3.3 R17.2 | length 15.4
  Top Layer w0.254: R17.2 29.194,10.206 30.763,8.637 39.537,8.637 40.17,9.27 IC3.3
Out2: IC3.4 R19.2 | length 16.6
  Top Layer w0.254: R19.2 28.546,12.678 29.273,12.678 29.422,12.529 29.422,11.278 30.787,9.913 39.213,9.913 39.84,10.54 IC3.4
Out3: IC3.5 R1.2 | length 17.8
  Top Layer w0.254: R1.2 28.546,15.151 29.85,15.151 30.3,14.7 30.3,12.3 31.425,11.175 32.494,11.175 38.875,11.175 39.51,11.81 IC3.5
Out4: IC3.6 R20.2 | length 17.9
  Top Layer w0.254: R20.2 30.477,17.623 31.1,17 31.1,14.6 31.984,13.716 36.616,13.716 36.777,13.877 40.023,13.877 40.82,13.08 IC3.6
Out8: IC2.2 R21.2 | length 15.7
  Top Layer w0.254: R21.2 29.129,25.729 31.44,28.04 35.44,28.04 36.07,28.67 IC2.2
Out9: IC2.3 R22.2 | length 15.2
  Top Layer w0.254: R22.2 29.41,28.31 30.408,29.308 35.301,29.308 35.933,29.94 IC2.3
Out10: IC2.4 R12.2 | length 14.9
  Top Layer w0.254: R12.2 31.451,30.891 31.77,30.573 35.269,30.573 35.906,31.21 IC2.4
Out11: IC2.5 R10.2 | length 15.4
  Top Layer w0.254: R10.2 29.627,33.473 31.261,31.839 35.139,31.839 35.78,32.48 IC2.5
Out12: IC2.6 R14.2 | length 16
  Top Layer w0.254: R14.2 29.246,36.054 32.188,33.112 35.112,33.112 35.75,33.75 IC2.6
Psp1: C4.2 PL1.C13 R27.1 | length 40.8
  Top Layer w0.254: R27.1@49.885,43.539 52.472,43.539 53.361,44.428 57.051,44.428 57.2,44.279 57.2,43.633 57.333,43.5 v1(59.5,43.5) ; v1(59.5,26.4) 59.548,26.352 59.548,25.852 59.8,25.6 64.272,25.6 64.7,25.172 69.868,25.172 PL1.C13
  Bottom Layer w0.254: v1(59.5,26.4) v1(59.5,43.5)
Psp2: C5.2 PL1.A12 R26.2 | length 36.9
  Top Layer w0.254: R26.2@49.885,45.952 52.242,45.952 53.131,46.841 57.145,46.841 57.294,46.692 C5.2 60.652,45.952 v1(60.7,46) ; v1(60.8,26.4) 60.815,26.415 66.055,26.415 PL1.A12
  Bottom Layer w0.254: v1(60.7,46) 60.75,45.95 60.75,26.45 v1(60.8,26.4)
Psp3: C6.2 PL1.A8 R25.2 | length 26.7
  Top Layer w0.254: R25.2 52.409,48.365 53.298,49.254 57.145,49.254 57.294,49.105 C6.2 ; C6.2@57.294,48.3 61,48.3 62,47.3 62,39.6 64.96,36.64 66.02,36.64 PL1.A8
Psp4: C7.2 PL1.B8 R24.2 | length 31.2
  Top Layer w0.254: R24.2@49.885,50.778 52.155,50.778 53.044,51.667 57.145,51.667 57.294,51.518 57.294,50.673 57.557,50.41 57.662,50.41 57.728,50.344 61.656,50.344 62.8,49.2 62.8,40.1 65.034,37.866 67.334,37.866 PL1.B8
Psp5: PL1.C8
Psp6: PL1.A3
Psp7: PL1.B3
Psp8: PL1.C3
Ready: PL1.A2
Rst: PL1.B4
VCC: C1.1 C2.1 C3.1 FS1.2 IC1.8 IC1.20 IC2.20 IC3.20 PL1.A7 PL1.C9 R2.2 R3.1 R4.1 R5.1 R6.1 R7.1 R8.1 R9.1 R11.1 R13.1 R16.2 R18.1 R23.2 | length 33.9
  Top Layer w0.254: v1(20.9,25.7) v1@20.914,25.715 ; v1(20.9,30.9) v1@20.904,30.896 ; v1(20.913,28.338) v1@20.927,28.324 ; R2.2@22.741,25.715 R2.2 ; R3.1@22.741,28.324 R3.1 ; R4.1@22.751,30.896 R4.1
  Top Layer w0.5: v1(20.9,17.5) 20.981,17.5 21.104,17.623 22.671,17.623 R7.1@22.694,17.6 ; v1@20.904,30.896 R4.1@22.751,30.896 ; v1@20.914,25.715 R2.2@22.741,25.715 ; v1@20.927,28.324 R3.1@22.741,28.324
  Bottom Layer w0.254: v1(62.4,27.6) 62.4,35.46 PL1.A7
  Bottom Layer w0.5: v1(20.9,17.5) v1(20.9,25.7) 20.906,25.706 20.906,30.894 v1(20.9,30.9)
pads on no net: PL1.MH1 PL1.MH2 SK1.MH1 SK1.MH2

## Polygon pours and split planes (outlines as drawn)
VCC on Top Layer "NONET_L-01_P-001" (solid, remove dead copper, pour order 0): 0,0 75,0 75,84 0,84
GND on Bottom Layer "NONET_L-01_P-001" (solid, remove dead copper, pour order 1): 0,0 75.001,-0.254 75,84 0,84

## Keep-outs
Keep-Out Layer:
  the board outline again, w0.254

## Other copper
Top Layer:
  text "1202,300/S1 ISS.A" at 11.7,1.033 h1
Bottom Layer:
  text "1202,300/S1 ISS.A" at 34.3,1.033 h1

## Silkscreen, mask and mechanical layers (free items; w line width, h text height)
Top Overlay:
  text "Re-created by IanJ, '24" at 46.301,81.008 h1.25
  text "JOYSTICK ADAPTER" at 5.754,80.354 h2
  text "1102,300 ISS.A" at 8.354,76.42 h2
  text "ACORN COMPUTERS" at 6.254,72.454 h2
  text "LK1,2,3,4:" at 29.254,65.562 h1.52
  text "POSITION 1 FOR DIGITAL" at 29.2,63.7 h1
  text "A" at 65.967,63.065 h1 r90
  text "B" at 68.126,63.065 h1 r90
  text "C" at 70.285,63.065 h1 r90
  text "POSITION 3 FOR ANALOGUE" at 29.2,62 h1
  text "1  2  3" at 20.9,61.1 h0.9
  text "1  2  3" at 20.9,55.7 h0.9
  text "1  2  3" at 20.9,50.5 h0.9
  text "1  2  3" at 20.9,45.1 h0.9
  text "LK5:-" at 45.154,35.954 h1.52
  text "CLOSED FOR DIGITAL" at 44.842,34.265 h1
  text "OPEN FOR ANALOGUE" at 44.969,32.741 h1
Board Shape:
  the board outline again, w0.254
Mechanical 12:
  lines w0.254: -10.025,39 79.325,39 ; 60.275,35.3 79.5,35.3 ; 68.6,-1.524 68.6,87.122